# Allegro board analog.brd
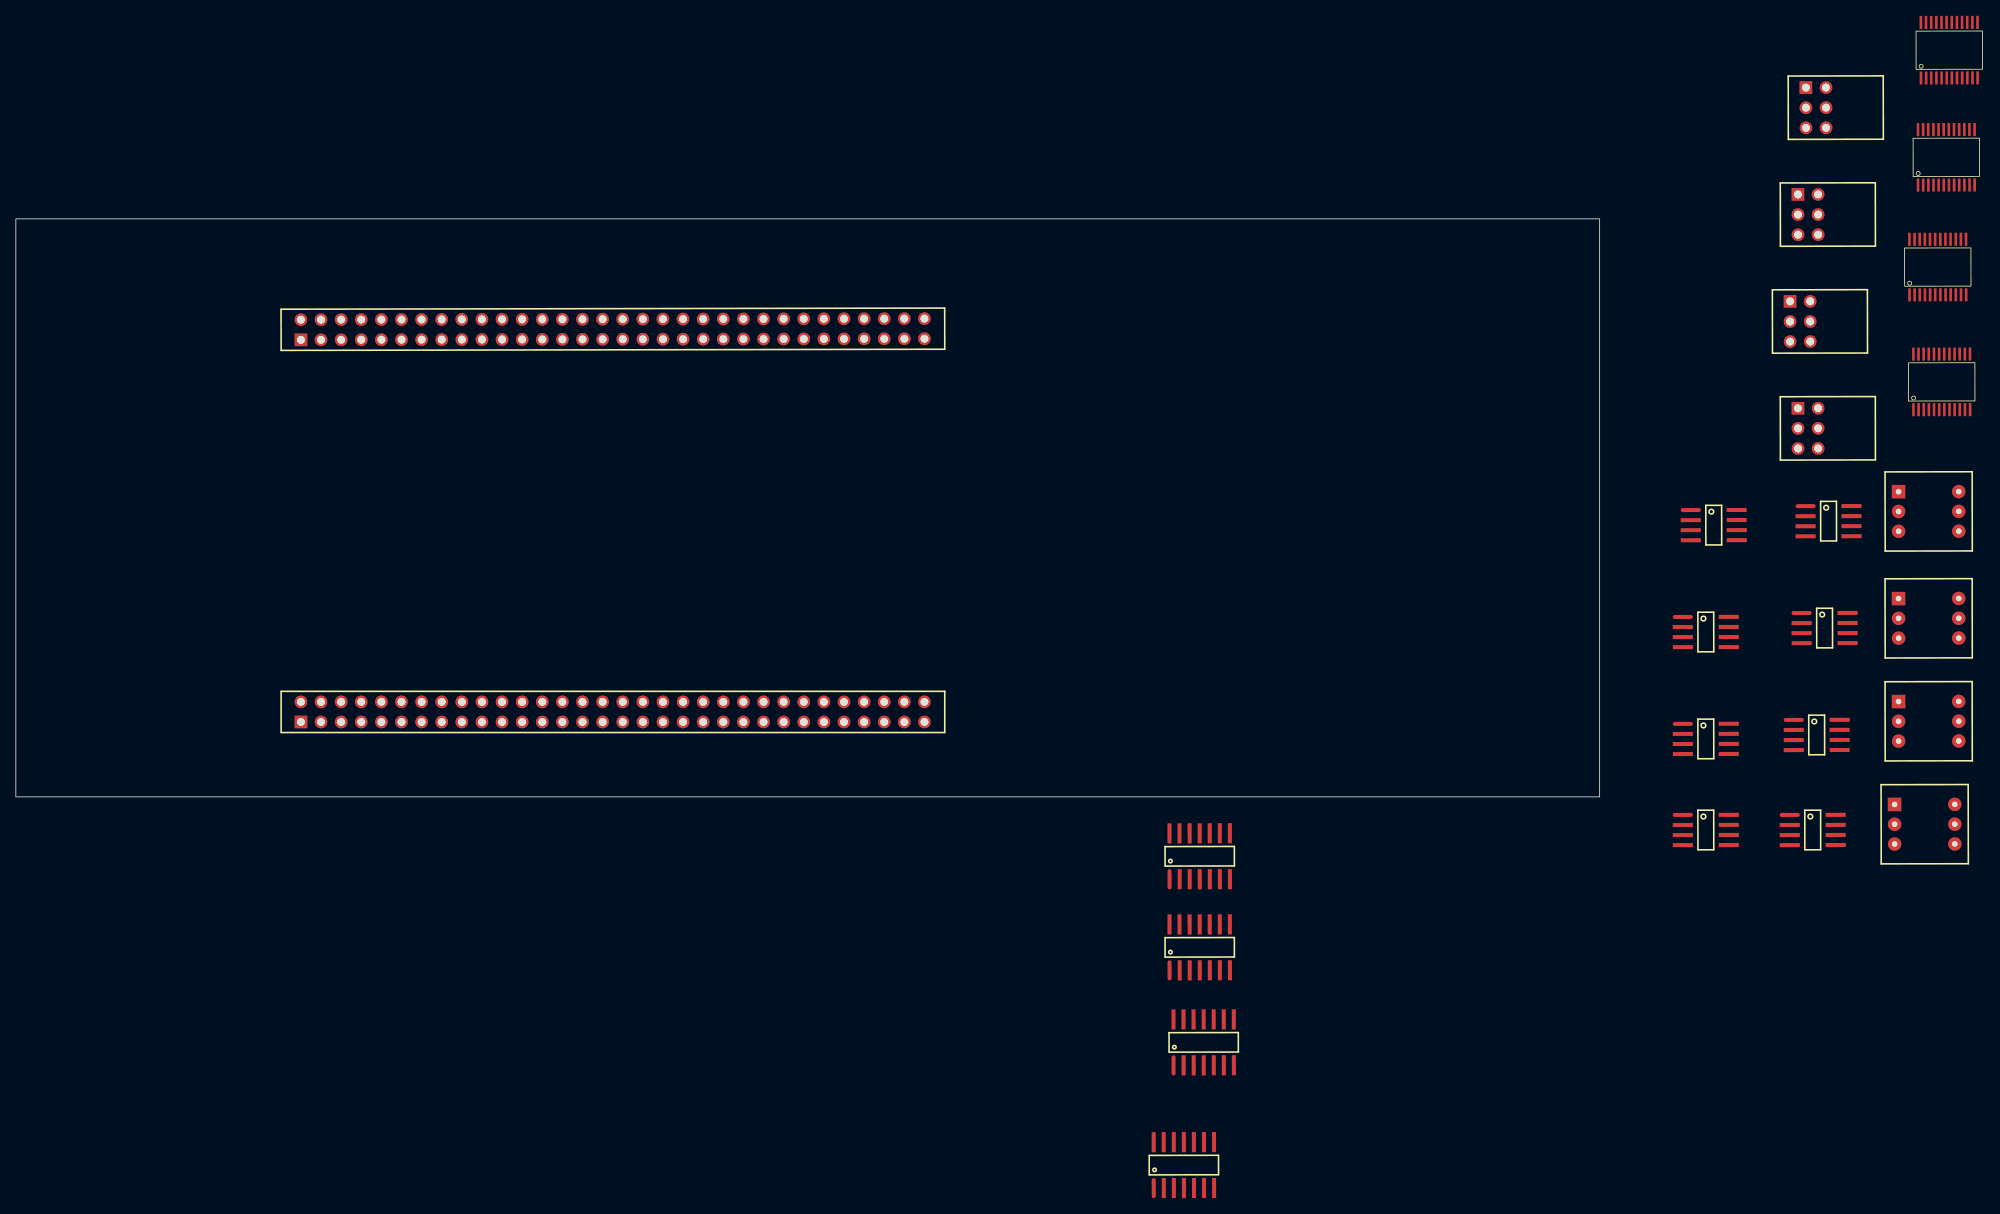
[diagram p0: board, top side]
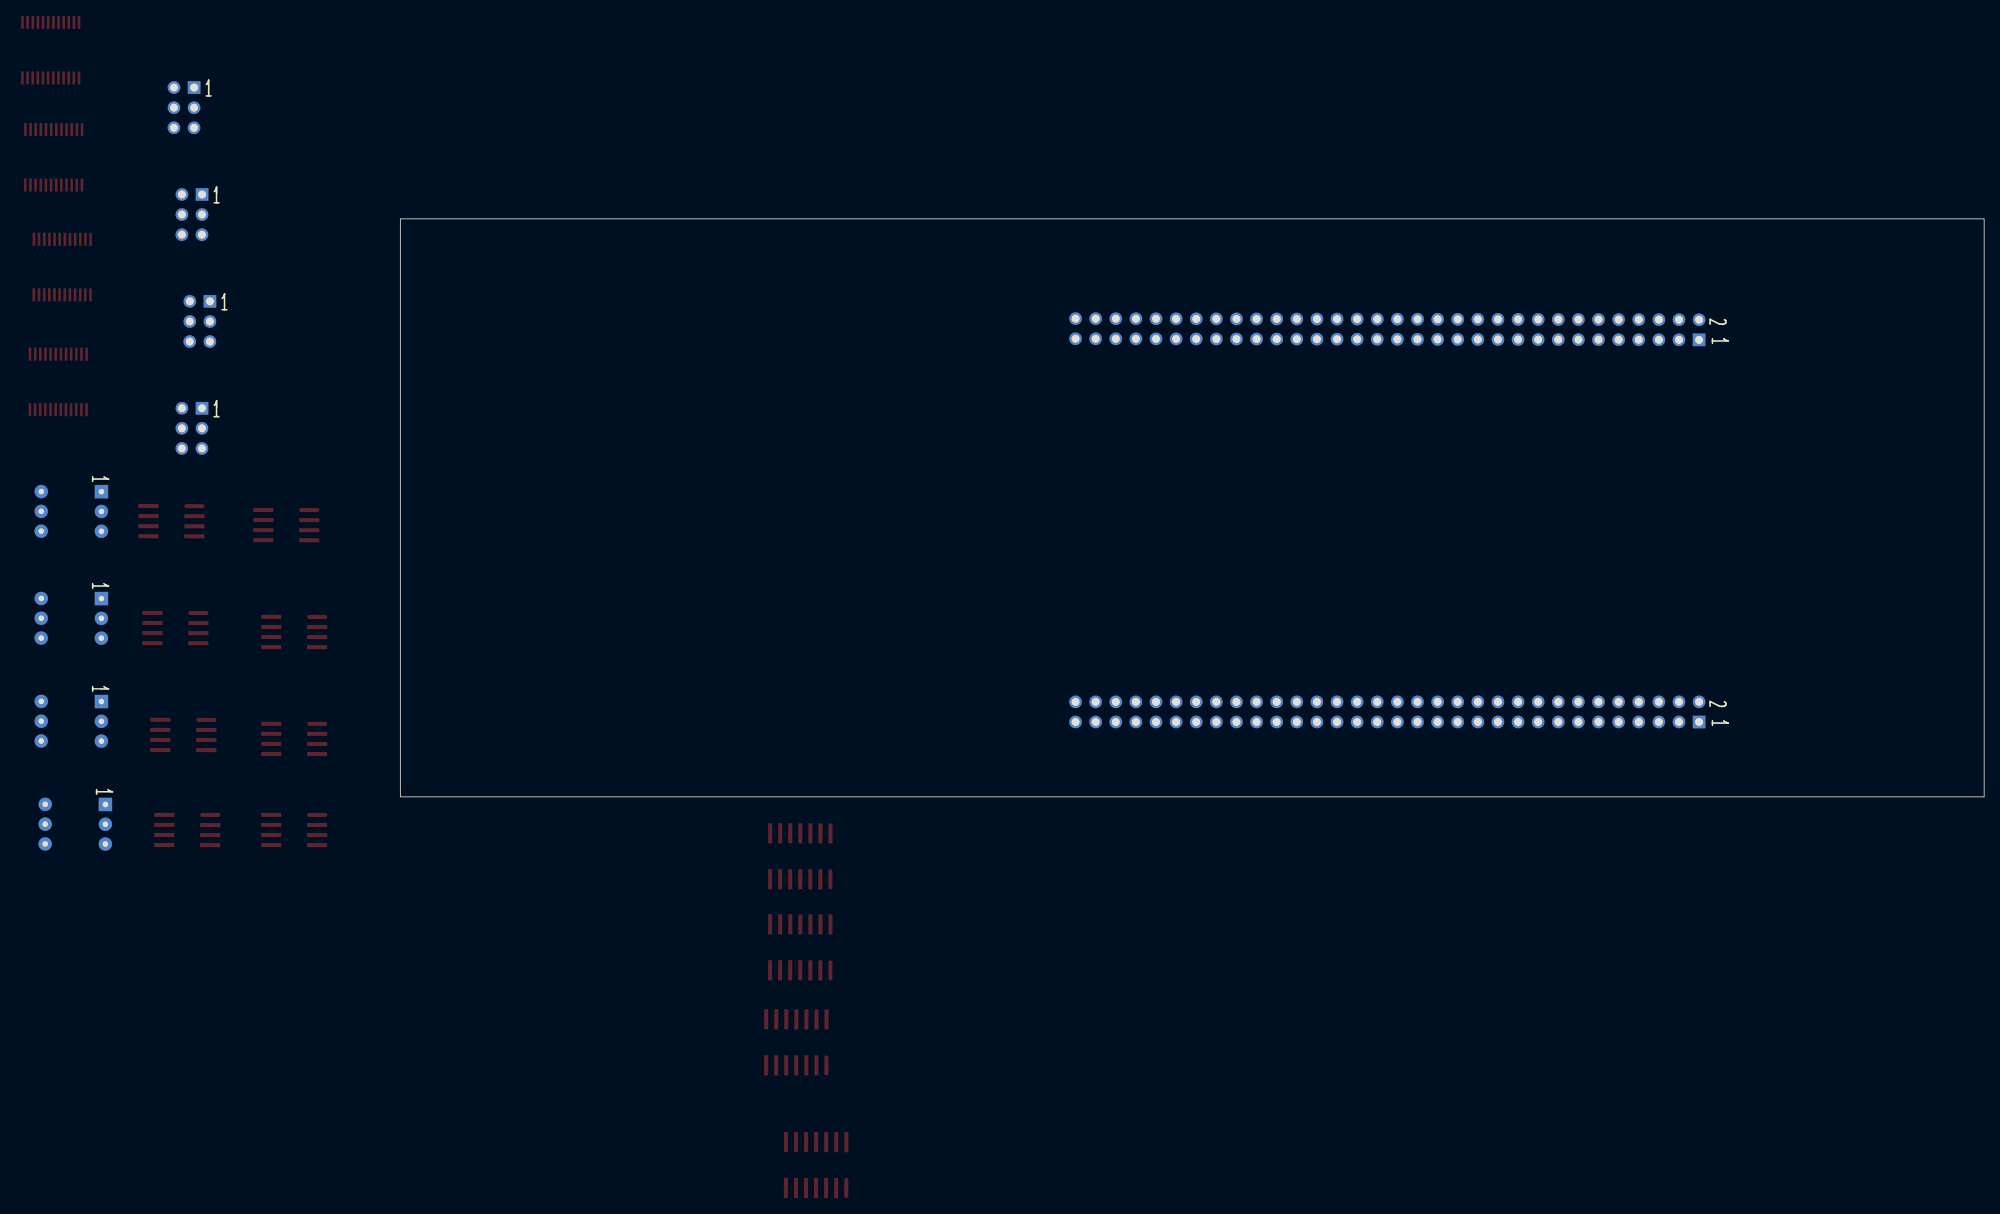
[diagram p1: board, bottom side, seen from below]

Outline 200 x 73 mm; copper layers: TOP, BOTTOM. Coordinates in mm from the lower left corner of the outline.
Outline path: rectangle 0,0 200,73

## Placement (name value [footprint] x y rotation side)
J1  -  [90122-0123]  227.32 87.04 0.1 top
J3  -  [90122-0123]  226.32 73.54 0.1 top
J4  -  [90122-0123]  225.32 60.04 0.1 top
J5  CONN SOCKET 32x2  [M20-6103245]  36 10.73 90 top
J6  CONN SOCKET 32x2  [M20-6103245]  36 58.99 90.1 top
J7  -  [90122-0123]  226.32 46.54 0.1 top
NOREF  -  []  0 0 90 top
NOREF#2  -  []  0 73 0 top
T1  -  [MET-31]  241.55 36.05 0.1 top
T2  -  [MET-31]  241.55 22.55 0.1 top
T3  -  [MET-31]  241.55 9.55 0.1 top
T4  -  [MET-31]  241.05 -3.45 0.1 top
U3  PGA2505IDB  [SSOP24]  242.7 66.91 90.1 top
U6  AD8599  [SOIC-8]  214.41 34.32 0.1 top
U7  AD8599  [SOIC-8]  228.91 34.82 0.1 top
U8  INA163  [SO-14]  147.5 -46.5 90.1 top
U9  PGA2505IDB  [SSOP24]  244.15 94.3 90.1 top
U10  AD8599  [SOIC-8]  213.41 20.82 0.1 top
U11  INA163  [SO-14]  149.5 -7.5 90.1 top
U12  AD8599  [SOIC-8]  228.41 21.32 0.1 top
U14  PGA2505IDB  [SSOP24]  243.2 52.41 90.1 top
U15  AD8599  [SOIC-8]  213.41 7.32 0.1 top
U16  AD8599  [SOIC-8]  227.41 7.82 0.1 top
U17  INA163  [SO-14]  149.5 -19 90.1 top
U18  PGA2505IDB  [SSOP24]  243.78 80.77 90.1 top
U19  AD8599  [SOIC-8]  213.41 -4.18 0.1 top
U20  AD8599  [SOIC-8]  226.91 -4.18 0.1 top
U21  INA163  [SO-14]  150 -31 90.1 top

## Library data of the parts
J1 J3 J4 J7 = HEADER 6
J5 J6 = CONN SOCKET 32x2
T1-T4 = TRNSFMR 456DS-1012_0
U3 U9 U14 U18 = PGA2505IDB_3: Tolerance: ***; User Part Number: ***
U6 U7 U10 U12 U15 U16 U19 U20 = AD8599_1
U8 U11 U17 U21 = INA163_0

## Footprints (pads in the part's own frame, mm; a bottom-side part is the same pattern mirrored in y, then rotated)
90122-0123
  rect 1.6x1.6 hole 1: 1(-1.27,2.54)
  round 1.6 hole 1: 2(1.27,2.54) 3(-1.27,0) 4(1.27,0) 5(-1.27,-2.54) 6(1.27,-2.54)
M20-6103245
  rect 1.6x1.6 hole 1: 1(-1.27,0)
  round 1.6 hole 1: 2(1.27,0) 3(-1.27,-2.54) 4(1.27,-2.54) 5(-1.27,-5.08) 6(1.27,-5.08) 7(-1.27,-7.62) 8(1.27,-7.62) 9(-1.27,-10.16) 10(1.27,-10.16) 11(-1.27,-12.7) 12(1.27,-12.7) 13(-1.27,-15.24) 14(1.27,-15.24) 15(-1.27,-17.78) 16(1.27,-17.78) 17(-1.27,-20.32) 18(1.27,-20.32) 19(-1.27,-22.86) 20(1.27,-22.86) 21(-1.27,-25.4) 22(1.27,-25.4) 23(-1.27,-27.94) 24(1.27,-27.94) 25(-1.27,-30.48) 26(1.27,-30.48) 27(-1.27,-33.02) 28(1.27,-33.02) 29(-1.27,-35.56) 30(1.27,-35.56) 31(-1.27,-38.1) 32(1.27,-38.1) 33(-1.27,-40.64) 34(1.27,-40.64) 35(-1.27,-43.18) 36(1.27,-43.18) 37(-1.27,-45.72) 38(1.27,-45.72) 39(-1.27,-48.26) 40(1.27,-48.26) 41(-1.27,-50.8) 42(1.27,-50.8) 43(-1.27,-53.34) 44(1.27,-53.34) 45(-1.27,-55.88) 46(1.27,-55.88) 47(-1.27,-58.42) 48(1.27,-58.42) 49(-1.27,-60.96) 50(1.27,-60.96) 51(-1.27,-63.5) 52(1.27,-63.5) 53(-1.27,-66.04) 54(1.27,-66.04) 55(-1.27,-68.58) 56(1.27,-68.58) 57(-1.27,-71.12) 58(1.27,-71.12) 59(-1.27,-73.66) 60(1.27,-73.66) 61(-1.27,-76.2) 62(1.27,-76.2) 63(-1.27,-78.74) 64(1.27,-78.74)
MET-31
  rect 1.7x1.7 hole 0.7: 1(-3.8,2.5)
  round 1.7 hole 0.7: 2(-3.8,0) 3(-3.8,-2.5) 4(3.8,-2.5) 5(3.8,0) 6(3.8,2.5)
SO-14
  oval 2.54x0.51 smd: 1(-2.9,3.81)
  rect 2.54x0.51 smd: 2(-2.9,2.54) 3(-2.9,1.27) 4(-2.9,0) 5(-2.9,-1.27) 6(-2.9,-2.54) 7(-2.9,-3.81) 8(2.9,-3.81) 9(2.9,-2.54) 10(2.9,-1.27) 11(2.9,0) 12(2.9,1.27) 13(2.9,2.54) 14(2.9,3.81)
SOIC-8
  oval 2.54x0.51 smd: 1(-2.9,1.905)
  rect 2.54x0.51 smd: 2(-2.9,0.635) 3(-2.9,-0.635) 4(-2.9,-1.905) 5(2.9,-1.905) 6(2.9,-0.635) 7(2.9,0.635) 8(2.9,1.905)
SSOP24
  rect 1.651x0.33 smd: 1(-3.505,3.576) 2(-3.505,2.926) 3(-3.505,2.276) 4(-3.505,1.626) 5(-3.505,0.975) 6(-3.505,0.325) 7(-3.505,-0.325) 8(-3.505,-0.975) 9(-3.505,-1.626) 10(-3.505,-2.276) 11(-3.505,-2.926) 12(-3.505,-3.576) 13(3.505,-3.576) 14(3.505,-2.926) 15(3.505,-2.276) 16(3.505,-1.626) 17(3.505,-0.975) 18(3.505,-0.325) 19(3.505,0.325) 20(3.505,0.975) 21(3.505,1.626) 22(3.505,2.276) 23(3.505,2.926) 24(3.505,3.576)

## Nets
5V: J5.5 J5.6 J6.61 J6.63
5VA12: J1.6 J3.6 U3.16(VAP) U6.8(+V) U7.8(+V) U8.11(V+) U9.16(VAP) U10.8(+V) U11.11(V+) U12.8(+V)
5VA34: J4.6 J7.6 U14.16(VAP) U15.8(+V) U16.8(+V) U17.11(V+) U18.16(VAP) U19.8(+V) U20.8(+V) U21.11(V+)
12V: J5.57
-5VA12: J1.1 J3.1 U3.12(VDN) U3.13(VAN2) U3.17(VAN1) U6.4(-V) U7.4(-V) U8.6(V-) U9.12(VDN) U9.13(VAN2) U9.17(VAN1) U10.4(-V) U11.6(V-) U12.4(-V)
-5VA34: J4.1 J7.1 U14.12(VDN) U14.13(VAN2) U14.17(VAN1) U15.4(-V) U16.4(-V) U17.6(V-) U18.12(VDN) U18.13(VAN2) U18.17(VAN1) U19.4(-V) U20.4(-V) U21.6(V-)
-12V: J5.64
0: J1.2 J1.5 J3.2 J3.5 J4.2 J4.5 J5.1 J5.2 J5.34 J5.43 J5.44 J5.45 J5.46 J5.52 J5.53 J5.54 J5.59 J5.60 J5.61 J5.62 J6.1 J6.2 J6.47 J6.48 J6.50 J6.51 J6.56 J6.58 J6.59 J6.64 J7.2 J7.5 T1.3 T1.5 T2.3 T2.5 T3.3 T3.5 T4.3 T4.5 U3.1(AGND) U3.7(DGND) U8.10(REF) U9.1(AGND) U9.7(DGND) U11.10(REF) U14.1(AGND) U14.7(DGND) U17.10(REF) U18.1(AGND) U18.7(DGND) U21.10(REF)
ADC1IN+: U3.15(VOUTP)
ADC1IN-: U3.14(VOUTN)
ADC2IN+: U9.15(VOUTP)
ADC2IN-: U9.14(VOUTN)
ADC3IN+: U14.15(VOUTP)
ADC3IN-: U14.14(VOUTN)
ADC4IN+: U18.15(VOUTP)
ADC4IN-: U18.14(VOUTN)
GPIO1: J6.13
GPIO2: J6.15
GPIO3: J6.14
GPIO4: J6.16
I2C2_SCL: J5.19
I2C2_SDA: J5.20
JTDI/SPI3_NSS: J5.17
MEAS_O1+: T1.4 U3.24(VINP)
MEAS_O1-: T1.6 U3.23(VINN)
MEAS_O2+: T2.4 U9.24(VINP)
MEAS_O2-: T2.6 U9.23(VINN)
MEAS_O3+: T3.4 U14.24(VINP)
MEAS_O3-: T3.6 U14.23(VINN)
MEAS_O4+: T4.4 U18.24(VINP)
MEAS_O4-: T4.6 U18.23(VINN)
OVR1: U3.6(OVR)
OVR2: U9.6(OVR)
OVR3: U14.6(OVR)
OVR4: U18.6(OVR)
SPI1_MISO: J5.29
SPI1_MOSI: J5.30
SPI1_NSS: J5.28
SPI1_SCK: J5.31
SPI3_MISO: J5.21
SPI3_MOSI: J5.18
SPI3_SCK: J5.22
VCOMIN: U3.22(VCOMIN) U9.22(VCOMIN) U14.22(VCOMIN) U18.22(VCOMIN)
N2130667: U3.21(CS11)
N2130674: U3.20(CS12)
N2130678: U3.19(CS21)
N2130682: U3.18(CS22)
N2130751: U9.21(CS11)
N2130771: U9.20(CS12)
N2130775: U9.19(CS21)
N2130779: U9.18(CS22)
N2130879: U14.21(CS11)
N2130899: U14.20(CS12)
N2130903: U14.19(CS21)
N2130907: U14.18(CS22)
N2130989: U18.21(CS11)
N2131009: U18.20(CS12)
N2131013: U18.19(CS21)
N2131017: U18.18(CS22)
N2138166: U3.9(CS) U9.9(CS) U14.9(CS) U18.9(CS)
N2138231: U3.8(SDI)
N2138243: U3.11(SDO) U9.8(SDI)
N2138255: U9.11(SDO) U14.8(SDI)
N2138267: U14.11(SDO) U18.8(SDI)
N2138279: U3.10(SCLK) U9.10(SCLK) U14.10(SCLK) U18.10(SCLK)
N2138333: U18.11(SDO)
N2188523: U8.5(VIN+)
N2188532: U8.4(VIN-)
N2188543: J1.4
N2188547: J1.3
N2188577: U8.3(GS1)
N2188581: U8.12(GS2)
N2191330: U8.8(SENSE) U8.9(VO)
N2194925: U7.3(+INA)
N2195660: U7.1(OUTA) U7.2(-INA)
N2196137: U7.6(-INB) U7.7(OUTB)
N2196999: U7.5(+INB)
N2200690: U6.3(+INA)
N2200699: U6.1(OUTA) U6.2(-INA)
N2201671: U6.5(+INB)
N2201796: U6.6(-INB) U6.7(OUTB)
N2203274: T1.1
N2208495: U12.6(-INB) U12.7(OUTB)
N2208511: U10.3(+INA)
N2208519: U10.1(OUTA) U10.2(-INA)
N2208727: U11.5(VIN+)
N2208735: U11.4(VIN-)
N2208743: J3.4
N2208771: U11.3(GS1)
N2208775: U11.12(GS2)
N2208783: U10.5(+INB)
N2208835: U10.6(-INB) U10.7(OUTB)
N2209011: T2.1
N2209091: U11.8(SENSE) U11.9(VO)
N2209227: U12.3(+INA)
N2209239: U12.1(OUTA) U12.2(-INA)
N2209379: U12.5(+INB)
N2211104: U16.6(-INB) U16.7(OUTB)
N2211120: U15.3(+INA)
N2211128: U15.1(OUTA) U15.2(-INA)
N2211336: U17.5(VIN+)
N2211344: U17.4(VIN-)
N2211352: J4.4
N2211380: U17.3(GS1)
N2211384: U17.12(GS2)
N2211392: U15.5(+INB)
N2211444: U15.6(-INB) U15.7(OUTB)
N2211620: T3.1
N2211700: U17.8(SENSE) U17.9(VO)
N2211836: U16.3(+INA)
N2211848: U16.1(OUTA) U16.2(-INA)
N2211988: U16.5(+INB)
N2216511: U20.6(-INB) U20.7(OUTB)
N2216527: U19.3(+INA)
N2216535: U19.1(OUTA) U19.2(-INA)
N2216743: U21.5(VIN+)
N2216751: U21.4(VIN-)
N2216759: J7.4
N2216787: U21.3(GS1)
N2216791: U21.12(GS2)
N2216799: U19.5(+INB)
N2216851: U19.6(-INB) U19.7(OUTB)
N2217027: T4.1
N2217107: U21.8(SENSE) U21.9(VO)
N2217243: U20.3(+INA)
N2217255: U20.1(OUTA) U20.2(-INA)
N2217395: U20.5(+INB)
N2255791: J3.3
N2256320: J4.3
N2256869: J7.3

Pads without a net: J5 3 4 7 8 9 10 11 12 13 14 15 16 23 24 25 26 27 32 33 35 36 37 38 39 40 41 42 47 48 49 50 51 55 56 58 63; J6 3 4 5 6 7 8 9 10 11 12 17 18 19 20 21 22 23 24 25 26 27 28 29 30 31 32 33 34 35 36 37 38 39 40 41 42 43 44 45 46 49 52 53 54 55 57 60 62; T1 2; T2 2; T3 2; T4 2; U3 2 3 4 5; U8 1 2 7 13 14; U9 2 3 4 5; U11 1 2 7 13 14; U14 2 3 4 5; U17 1 2 7 13 14; U18 2 3 4 5; U21 1 2 7 13 14
